# EAGLE board MRCS-odTester_array (EAGLE 7.7.0)
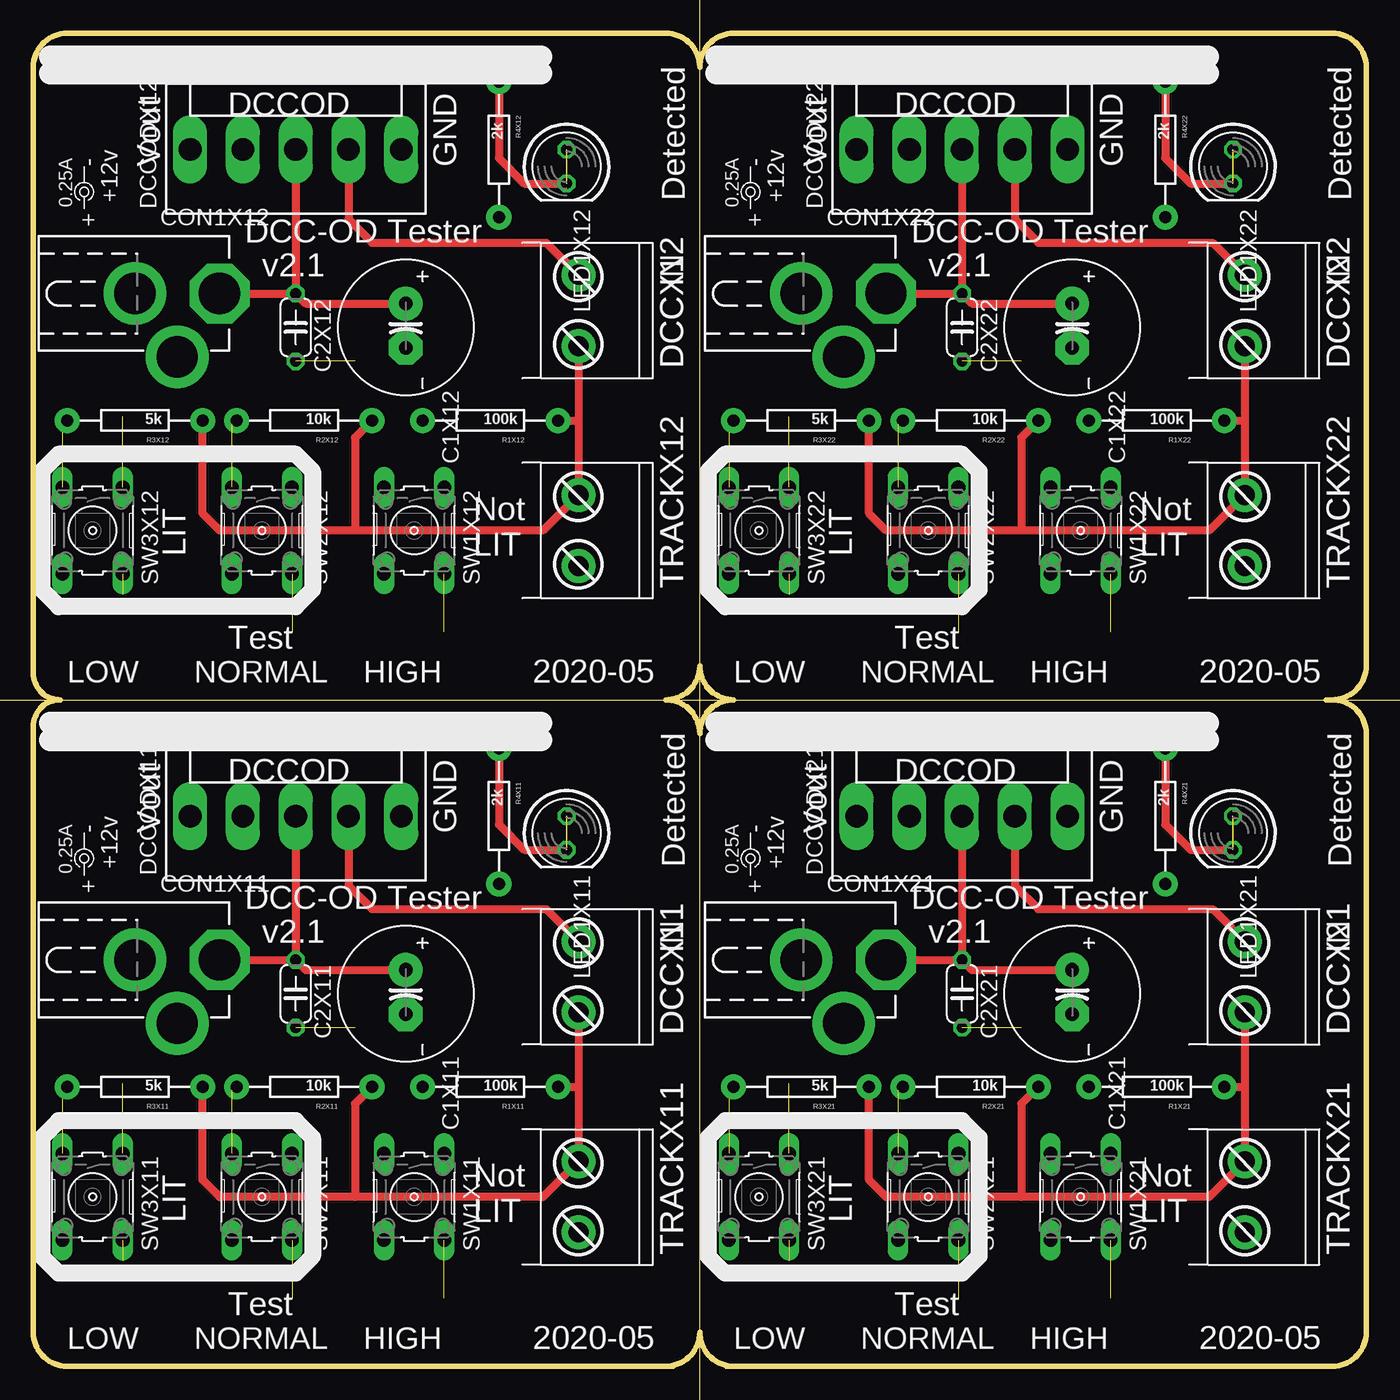
[diagram p0: board, top side]
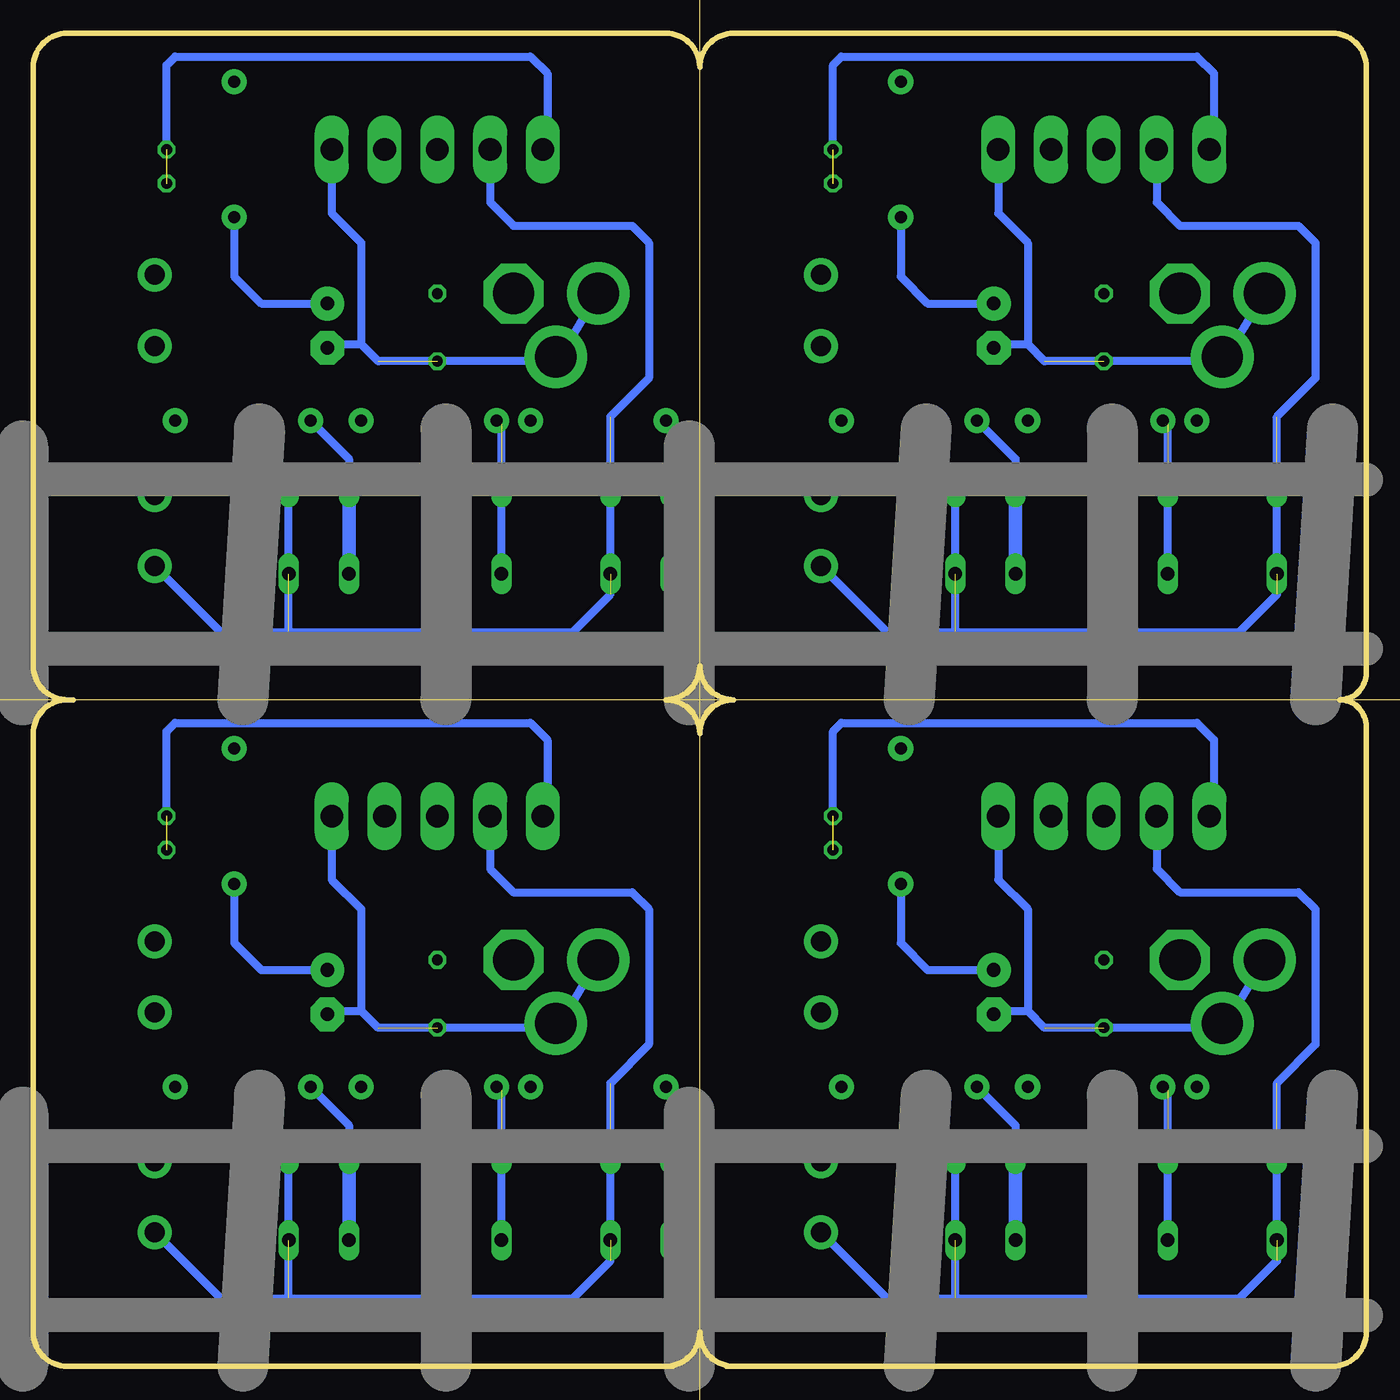
[diagram p1: board, bottom side, seen from below]

Size 100 x 100 mm. Coordinates in mm from the lower left corner, seen from the top.
Copper layers (1*16): Top 0.035mm / dielectric 1.5mm / Bottom 0.035mm
Design rules "default": minimum track width 10mil, minimum drill 0.6mm, track to track 8mil, track to pad 8mil, pad to pad 8mil, via to via 8mil, smd to smd 8mil, copper to edge 40mil, drill to drill 8mil, minimum pad ring 10mil, minimum via ring 8mil, stop-mask expansion 4mil, vias tented up to drill 0mil, thermal gap 10mil

## Footprints (pad centres in the part's own frame; a part is rotated, then mirrored left to right if it is on the bottom)
E3.5-10 = drill 1.016 pad 2.54: + -1.79,0 | drill 1.016 pad 2.54 octagon: - 1.54,0
C050-024X044 = drill 0.813 octagon: 1 -2.54,0; 2 2.54,0
DCJ0202 = drill 3.1 pad 4.5 octagon: 1 0,3.175 | drill 3.1 pad 4.7: 2 4.763,0; 3 0,-3.175
KK-156-5 = drill 1.7 pad 2.184 long: 1 -7.92,0; 2 -3.96,0; 3 0,0; 4 3.96,0; 5 7.92,0
MSTB2 = drill 1.5 pad 2.54: 1 -2.667,1.016; 2 2.667,1.016
LED5MM = drill 0.813 octagon: A 1.27,0; K -1.27,0
AXIAL-0.4-RES = drill 0.9 pad 1.88: P$1 -5.08,0; P$2 5.08,0
B3F-10XX = drill 1.016 long: 1 -3.251,2.261; 2 3.251,2.261; 3 -3.251,-2.261; 4 3.251,-2.261

## Placement (x,y rotation side)
C1X11  100uF  [E3.5-10]  27.94,27.94 270 top
C1X12  100uF  [E3.5-10]  27.94,77.94 270 top
C1X21  100uF  [E3.5-10]  77.94,27.94 270 top
C1X22  100uF  [E3.5-10]  77.94,77.94 270 top
C2X11  0.1uf  [C050-024X044]  19.68,27.94 270 top
C2X12  0.1uf  [C050-024X044]  19.68,77.94 270 top
C2X21  0.1uf  [C050-024X044]  69.69,27.94 270 top
C2X22  0.1uf  [C050-024X044]  69.69,77.94 270 top
CON1X11  [DCJ0202]  10.79,30.48 270 top
CON1X12  [DCJ0202]  10.79,80.48 270 top
CON1X21  [DCJ0202]  60.8,30.48 270 top
CON1X22  [DCJ0202]  60.8,80.48 270 top
DCCODX11  [KK-156-5]  19.68,41.27 0 top
DCCODX12  [KK-156-5]  19.68,91.28 0 top
DCCODX21  [KK-156-5]  69.69,41.27 0 top
DCCODX22  [KK-156-5]  69.69,91.28 0 top
DCCX11  [MSTB2]  41.91,29.21 90 top
DCCX12  [MSTB2]  41.91,79.21 90 top
DCCX21  [MSTB2]  91.91,29.21 90 top
DCCX22  [MSTB2]  91.91,79.21 90 top
LED1X11  [LED5MM]  40.01,40.01 90 top
LED1X12  [LED5MM]  40.01,90 90 top
LED1X21  [LED5MM]  90,40.01 90 top
LED1X22  [LED5MM]  90,90 90 top
R1X11  100k  [AXIAL-0.4-RES]  34.29,20.95 180 top
R1X12  100k  [AXIAL-0.4-RES]  34.29,70.95 180 top
R1X21  100k  [AXIAL-0.4-RES]  84.29,20.95 180 top
R1X22  100k  [AXIAL-0.4-RES]  84.29,70.95 180 top
R2X11  10k  [AXIAL-0.4-RES]  20.32,20.95 180 top
R2X12  10k  [AXIAL-0.4-RES]  20.32,70.95 180 top
R2X21  10k  [AXIAL-0.4-RES]  70.32,20.95 180 top
R2X22  10k  [AXIAL-0.4-RES]  70.32,70.95 180 top
R3X11  5k  [AXIAL-0.4-RES]  7.62,20.95 180 top
R3X12  5k  [AXIAL-0.4-RES]  7.62,70.95 180 top
R3X21  5k  [AXIAL-0.4-RES]  57.62,20.95 180 top
R3X22  5k  [AXIAL-0.4-RES]  57.62,70.95 180 top
R4X11  2k  [AXIAL-0.4-RES]  34.92,41.27 270 top
R4X12  2k  [AXIAL-0.4-RES]  34.92,91.28 270 top
R4X21  2k  [AXIAL-0.4-RES]  84.92,41.27 270 top
R4X22  2k  [AXIAL-0.4-RES]  84.92,91.28 270 top
SW1X11  [B3F-10XX]  28.57,12.7 270 top
SW1X12  [B3F-10XX]  28.57,62.7 270 top
SW1X21  [B3F-10XX]  78.58,12.7 270 top
SW1X22  [B3F-10XX]  78.58,62.7 270 top
SW2X11  [B3F-10XX]  17.14,12.7 270 top
SW2X12  [B3F-10XX]  17.14,62.7 270 top
SW2X21  [B3F-10XX]  67.14,12.7 270 top
SW2X22  [B3F-10XX]  67.14,62.7 270 top
SW3X11  [B3F-10XX]  4.45,12.7 270 top
SW3X12  [B3F-10XX]  4.45,62.7 270 top
SW3X21  [B3F-10XX]  54.45,12.7 270 top
SW3X22  [B3F-10XX]  54.45,62.7 270 top
TRACKX11  [MSTB2]  41.91,12.7 90 top
TRACKX12  [MSTB2]  41.91,62.7 90 top
TRACKX21  [MSTB2]  91.91,12.7 90 top
TRACKX22  [MSTB2]  91.91,62.7 90 top
U$1X1  [BOARD-10X10-2X2-PANEL-R]  0,0 0 top
U$1X11  +12v  [PWR_LABEL]  3.81,38.1 180 top
U$1X12  +12v  [PWR_LABEL]  3.81,88.1 180 top
U$1X21  +12v  [PWR_LABEL]  53.81,38.1 180 top
U$1X22  +12v  [PWR_LABEL]  53.81,88.1 180 top

## Library data of the parts
C1X11 C1X12 C1X21 C1X22 C2X11 C2X12 C2X21 C2X22 CON1X11 CON1X12 CON1X21 CON1X22 DCCX11 DCCX12 DCCX21 DCCX22 LED1X11 LED1X12 LED1X21 LED1X22 R1X11 R1X12 R1X21 R1X22 R2X11 R2X12 R2X21 R2X22 R3X11 R3X12 R3X21 R3X22 R4X11 R4X12 R4X21 R4X22 SW1X11 SW1X12 SW1X21 SW1X22 SW2X11 SW2X12 SW2X21 SW2X22 SW3X11 SW3X12 SW3X21 SW3X22 TRACKX11 TRACKX12 TRACKX21 TRACKX22 U$1X1 U$1X11 U$1X12 U$1X21 U$1X22 = SPCoast
DCCODX11 DCCODX12 DCCODX21 DCCODX22 = con-molex

## Nets
+12VX11: C1X11.+ C2X11.1 CON1X11.1 DCCODX11.3 R4X11.P$2
+12VX12: C1X12.+ C2X12.1 CON1X12.1 DCCODX12.3 R4X12.P$2
+12VX21: C1X21.+ C2X21.1 CON1X21.1 DCCODX21.3 R4X21.P$2
+12VX22: C1X22.+ C2X22.1 CON1X22.1 DCCODX22.3 R4X22.P$2
DCC-COMMONX11: DCCODX11.4 DCCX11.2
DCC-COMMONX12: DCCODX12.4 DCCX12.2
DCC-COMMONX21: DCCODX21.4 DCCX21.2
DCC-COMMONX22: DCCODX22.4 DCCX22.2
DCC-FROMTRACKX11: DCCODX11.2 SW1X11.1 SW1X11.2 SW2X11.1 SW2X11.2 SW3X11.1 SW3X11.2 TRACKX11.1
DCC-FROMTRACKX12: DCCODX12.2 SW1X12.1 SW1X12.2 SW2X12.1 SW2X12.2 SW3X12.1 SW3X12.2 TRACKX12.1
DCC-FROMTRACKX21: DCCODX21.2 SW1X21.1 SW1X21.2 SW2X21.1 SW2X21.2 SW3X21.1 SW3X21.2 TRACKX21.1
DCC-FROMTRACKX22: DCCODX22.2 SW1X22.1 SW1X22.2 SW2X22.1 SW2X22.2 SW3X22.1 SW3X22.2 TRACKX22.1
DCC-TOTRACKX11: DCCX11.1 R1X11.P$1 R2X11.P$1 R3X11.P$1 TRACKX11.2
DCC-TOTRACKX12: DCCX12.1 R1X12.P$1 R2X12.P$1 R3X12.P$1 TRACKX12.2
DCC-TOTRACKX21: DCCX21.1 R1X21.P$1 R2X21.P$1 R3X21.P$1 TRACKX21.2
DCC-TOTRACKX22: DCCX22.1 R1X22.P$1 R2X22.P$1 R3X22.P$1 TRACKX22.2
GNDX11: C1X11.- C2X11.2 CON1X11.2 CON1X11.3 DCCODX11.5
GNDX12: C1X12.- C2X12.2 CON1X12.2 CON1X12.3 DCCODX12.5
GNDX21: C1X21.- C2X21.2 CON1X21.2 CON1X21.3 DCCODX21.5
GNDX22: C1X22.- C2X22.2 CON1X22.2 CON1X22.3 DCCODX22.5
N$1X11: R1X11.P$2 SW1X11.3 SW1X11.4
N$1X12: R1X12.P$2 SW1X12.3 SW1X12.4
N$1X21: R1X21.P$2 SW1X21.3 SW1X21.4
N$1X22: R1X22.P$2 SW1X22.3 SW1X22.4
N$2X11: R2X11.P$2 SW2X11.3 SW2X11.4
N$2X12: R2X12.P$2 SW2X12.3 SW2X12.4
N$2X21: R2X21.P$2 SW2X21.3 SW2X21.4
N$2X22: R2X22.P$2 SW2X22.3 SW2X22.4
N$3X11: R3X11.P$2 SW3X11.3 SW3X11.4
N$3X12: R3X12.P$2 SW3X12.3 SW3X12.4
N$3X21: R3X21.P$2 SW3X21.3 SW3X21.4
N$3X22: R3X22.P$2 SW3X22.3 SW3X22.4
N$5X11: LED1X11.A R4X11.P$1
N$5X12: LED1X12.A R4X12.P$1
N$5X21: LED1X21.A R4X21.P$1
N$5X22: LED1X22.A R4X22.P$1
VOUTX11: DCCODX11.1 LED1X11.K
VOUTX12: DCCODX12.1 LED1X12.K
VOUTX21: DCCODX21.1 LED1X21.K
VOUTX22: DCCODX22.1 LED1X22.K

## Tracks (layer width: path | path; a pad name or v marks a point on that pad's centre or on a via)
+12VX11
  Top 0.61: CON1X11.1 C2X11.1 | DCCODX11.3 C2X11.1 | C2X11.1 20.43,29.73 C1X11.+
  Bottom 0.61: R4X11.P$2 34.92,31.75 32.91,29.73 C1X11.+
+12VX12
  Top 0.61: CON1X12.1 C2X12.1 | DCCODX12.3 C2X12.1 | C2X12.1 20.43,79.73 C1X12.+
  Bottom 0.61: R4X12.P$2 34.92,81.75 32.91,79.73 C1X12.+
+12VX21
  Top 0.61: CON1X21.1 C2X21.1 | DCCODX21.3 C2X21.1 | C2X21.1 70.44,29.73 C1X21.+
  Bottom 0.61: R4X21.P$2 84.92,31.75 82.91,29.73 C1X21.+
+12VX22
  Top 0.61: CON1X22.1 C2X22.1 | DCCODX22.3 C2X22.1 | C2X22.1 70.44,79.73 C1X22.+
  Bottom 0.61: R4X22.P$2 84.92,81.75 82.91,79.73 C1X22.+
DCC-COMMONX11
  Top 0.61: DCCODX11.4 23.64,36.05 25.4,34.29 38.48,34.29 DCCX11.2
DCC-COMMONX12
  Top 0.61: DCCODX12.4 23.64,86.05 25.4,84.29 38.48,84.29 DCCX12.2
DCC-COMMONX21
  Top 0.61: DCCODX21.4 73.64,36.05 75.4,34.29 88.48,34.29 DCCX21.2
DCC-COMMONX22
  Top 0.61: DCCODX22.4 73.64,86.05 75.4,84.29 88.48,84.29 DCCX22.2
DCC-FROMTRACKX11  (4 unrouted)
  Bottom 0.61: 19.41,5.08 SW2X11.1 | 30.84,5.08 SW1X11.1 | TRACKX11.1 35.94,5.08 30.84,5.08 | 30.84,5.08 19.41,5.08 | 19.41,5.08 9.53,5.08 6.71,7.9 6.71,21.23 3.81,24.13 3.81,34.29 5.08,35.56 13.97,35.56 15.72,37.31 DCCODX11.2
DCC-FROMTRACKX12  (4 unrouted)
  Bottom 0.61: 19.41,55.08 SW2X12.1 | 30.84,55.08 SW1X12.1 | TRACKX12.1 35.94,55.08 30.84,55.08 | 30.84,55.08 19.41,55.08 | 19.41,55.08 9.53,55.08 6.71,57.9 6.71,71.23 3.81,74.13 3.81,84.29 5.08,85.56 13.97,85.56 15.72,87.31 DCCODX12.2
DCC-FROMTRACKX21  (4 unrouted)
  Bottom 0.61: 69.41,5.08 SW2X21.1 | 80.84,5.08 SW1X21.1 | TRACKX21.1 85.94,5.08 80.84,5.08 | 80.84,5.08 69.41,5.08 | 69.41,5.08 59.52,5.08 56.71,7.9 56.71,21.23 53.81,24.13 53.81,34.29 55.08,35.56 63.97,35.56 65.72,37.31 DCCODX21.2
DCC-FROMTRACKX22  (4 unrouted)
  Bottom 0.61: 69.41,55.08 SW2X22.1 | 80.84,55.08 SW1X22.1 | TRACKX22.1 85.94,55.08 80.84,55.08 | 80.84,55.08 69.41,55.08 | 69.41,55.08 59.52,55.08 56.71,57.9 56.71,71.23 53.81,74.13 53.81,84.29 55.08,85.56 63.97,85.56 65.72,87.31 DCCODX22.2
DCC-TOTRACKX11
  Top 0.61: 24.13,12.7 38.23,12.7 TRACKX11.2 40.89,20.95 | 24.13,12.7 13.97,12.7 12.7,13.97 R3X11.P$1 | DCCX11.1 40.89,20.95 | R1X11.P$1 40.89,20.95 | R2X11.P$1 24.13,19.68 24.13,12.7
DCC-TOTRACKX12
  Top 0.61: 24.13,62.7 38.23,62.7 TRACKX12.2 40.89,70.95 | 24.13,62.7 13.97,62.7 12.7,63.97 R3X12.P$1 | DCCX12.1 40.89,70.95 | R1X12.P$1 40.89,70.95 | R2X12.P$1 24.13,69.69 24.13,62.7
DCC-TOTRACKX21
  Top 0.61: 74.13,12.7 88.23,12.7 TRACKX21.2 90.89,20.95 | 74.13,12.7 63.97,12.7 62.7,13.97 R3X21.P$1 | DCCX21.1 90.89,20.95 | R1X21.P$1 90.89,20.95 | R2X21.P$1 74.13,19.68 74.13,12.7
DCC-TOTRACKX22
  Top 0.61: 74.13,62.7 88.23,62.7 TRACKX22.2 90.89,70.95 | 74.13,62.7 63.97,62.7 62.7,63.97 R3X22.P$1 | DCCX22.1 90.89,70.95 | R1X22.P$1 90.89,70.95 | R2X22.P$1 74.13,69.69 74.13,62.7
GNDX11  (1 unrouted)
  Bottom 0.61: CON1X11.3 9.53,27.3 CON1X11.2 10.79,25.4 24.13,25.4 25.4,26.67 | DCCODX11.5 27.61,36.49 25.4,34.29 25.4,26.67 | C1X11.- 27.67,26.67 25.4,26.67
GNDX12  (1 unrouted)
  Bottom 0.61: CON1X12.3 9.53,77.31 CON1X12.2 10.79,75.4 24.13,75.4 25.4,76.67 | DCCODX12.5 27.61,86.5 25.4,84.29 25.4,76.67 | C1X12.- 27.67,76.67 25.4,76.67
GNDX21  (1 unrouted)
  Bottom 0.61: CON1X21.3 59.52,27.3 CON1X21.2 60.8,25.4 74.13,25.4 75.4,26.67 | DCCODX21.5 77.61,36.49 75.4,34.29 75.4,26.67 | C1X21.- 77.67,26.67 75.4,26.67
GNDX22  (1 unrouted)
  Bottom 0.61: CON1X22.3 59.52,77.31 CON1X22.2 60.8,75.4 74.13,75.4 75.4,76.67 | DCCODX22.5 77.61,86.5 75.4,84.29 75.4,76.67 | C1X22.- 77.67,76.67 75.4,76.67
N$1X11
  Bottom 0.61: R1X11.P$2 26.31,18.06 SW1X11.3
  Bottom 1.016: SW1X11.3 SW1X11.4
N$1X12
  Bottom 0.61: R1X12.P$2 26.31,68.06 SW1X12.3
  Bottom 1.016: SW1X12.3 SW1X12.4
N$1X21
  Bottom 0.61: R1X21.P$2 76.31,18.06 SW1X21.3
  Bottom 1.016: SW1X21.3 SW1X21.4
N$1X22
  Bottom 0.61: R1X22.P$2 76.31,68.06 SW1X22.3
  Bottom 1.016: SW1X22.3 SW1X22.4
N$2X11  (1 unrouted)
  Bottom 0.61: SW2X11.4 14.88,20.68 R2X11.P$2
N$2X12  (1 unrouted)
  Bottom 0.61: SW2X12.4 14.88,70.68 R2X12.P$2
N$2X21  (1 unrouted)
  Bottom 0.61: SW2X21.4 64.88,20.68 R2X21.P$2
N$2X22  (1 unrouted)
  Bottom 0.61: SW2X22.4 64.88,70.68 R2X22.P$2
N$3X11  (1 unrouted)
  Bottom 0.61: R3X11.P$2 2.18,20.04 SW3X11.4
N$3X12  (1 unrouted)
  Bottom 0.61: R3X12.P$2 2.18,70.04 SW3X12.4
N$3X21  (1 unrouted)
  Bottom 0.61: R3X21.P$2 52.18,20.04 SW3X21.4
N$3X22  (1 unrouted)
  Bottom 0.61: R3X22.P$2 52.18,70.04 SW3X22.4
N$5X11  (1 unrouted)
  Top 0.61: R4X11.P$1 34.92,40.64 36.83,38.73 40.01,38.73
N$5X12  (1 unrouted)
  Top 0.61: R4X12.P$1 34.92,90.64 36.83,88.73 40.01,88.73
N$5X21  (1 unrouted)
  Top 0.61: R4X21.P$1 84.92,40.64 86.83,38.73 90,38.73
N$5X22  (1 unrouted)
  Top 0.61: R4X22.P$1 84.92,90.64 86.83,88.73 90,88.73
VOUTX11  (1 unrouted)
  Bottom 0.61: 40.01,41.27 40.01,47.62 39.37,48.26 12.7,48.26 11.43,46.99 11.43,41.61 DCCODX11.1
VOUTX12  (1 unrouted)
  Bottom 0.61: 40.01,91.28 40.01,97.62 39.37,98.26 12.7,98.26 11.43,96.99 11.43,91.61 DCCODX12.1
VOUTX21  (1 unrouted)
  Bottom 0.61: 90,41.27 90,47.62 89.37,48.26 62.7,48.26 61.43,46.99 61.43,41.61 DCCODX21.1
VOUTX22  (1 unrouted)
  Bottom 0.61: 90,91.28 90,97.62 89.37,98.26 62.7,98.26 61.43,96.99 61.43,91.61 DCCODX22.1

## Text on the board
Route14: R4 | R4 | C2 | C2 | R3 | R2 | R1 | R3 | R2 | R1 | R4 | R4 | C2 | C2 | R3 | R2 | R1 | R3 | R2 | R1
tPlace: DCCOD | DCCOD | 0.25A | 0.25A | Vout | GND | Vout | GND | Detected | Detected | DCC-OD Tester | DCC-OD Tester | v2.1 | v2.1 | DCC IN | DCC IN | LIT | Not / LIT | LIT | Not / LIT | TRACK | TRACK | Test | Test | LOW | NORMAL | HIGH | 2020-05 | LOW | NORMAL | HIGH | 2020-05 | DCCOD | DCCOD | 0.25A | 0.25A | Vout | GND | Vout | GND | Detected | Detected | DCC-OD Tester | DCC-OD Tester | v2.1 | v2.1 | DCC IN | DCC IN | LIT | Not / LIT | LIT | Not / LIT | TRACK | TRACK | Test | Test | LOW | NORMAL | HIGH | 2020-05 | LOW | NORMAL | HIGH | 2020-05
bDocu: Model Railroading / is Fun! | If only "low" lights, the detector is not sensitive enough | Model Railroading / is Fun! | If only "low" lights, the detector is not sensitive enough | "Low" and "Normal" lights is a PASS | "Low" and "Normal" lights is a PASS | If all three light, the detector is too sensitive | If all three light, the detector is too sensitive | Made in the PCR, / Coast Div, NMRA | Made in the PCR, / Coast Div, NMRA | DCCOD Tester | DCCOD Tester | Adjust for Normal Detection / and not too High | Adjust for Normal Detection / and not too High | Go Bears! | www.SPCoast.com | Go Bears! | www.SPCoast.com | Model Railroading / is Fun! | If only "low" lights, the detector is not sensitive enough | Model Railroading / is Fun! | If only "low" lights, the detector is not sensitive enough | "Low" and "Normal" lights is a PASS | "Low" and "Normal" lights is a PASS | If all three light, the detector is too sensitive | If all three light, the detector is too sensitive | Made in the PCR, / Coast Div, NMRA | Made in the PCR, / Coast Div, NMRA | DCCOD Tester | DCCOD Tester | Adjust for Normal Detection / and not too High | Adjust for Normal Detection / and not too High | Go Bears! | www.SPCoast.com | Go Bears! | www.SPCoast.com
_tNames: R4 | R4 | LED1 | LED1 | DCCOD | DCCOD | CON1 | CON1 | C2 | C1 | C2 | C1 | DCC | DCC | R3 | R2 | R1 | R3 | R2 | R1 | TRACK | TRACK | SW3 | SW2 | SW1 | SW3 | SW2 | SW1 | R4 | R4 | LED1 | LED1 | DCCOD | DCCOD | CON1 | CON1 | C2 | C1 | C2 | C1 | DCC | DCC | R3 | R2 | R1 | R3 | R2 | R1 | TRACK | TRACK | SW3 | SW2 | SW1 | SW3 | SW2 | SW1